# EAGLE board BulkBoard2 (EAGLE 9.0.0), part 1 of 2
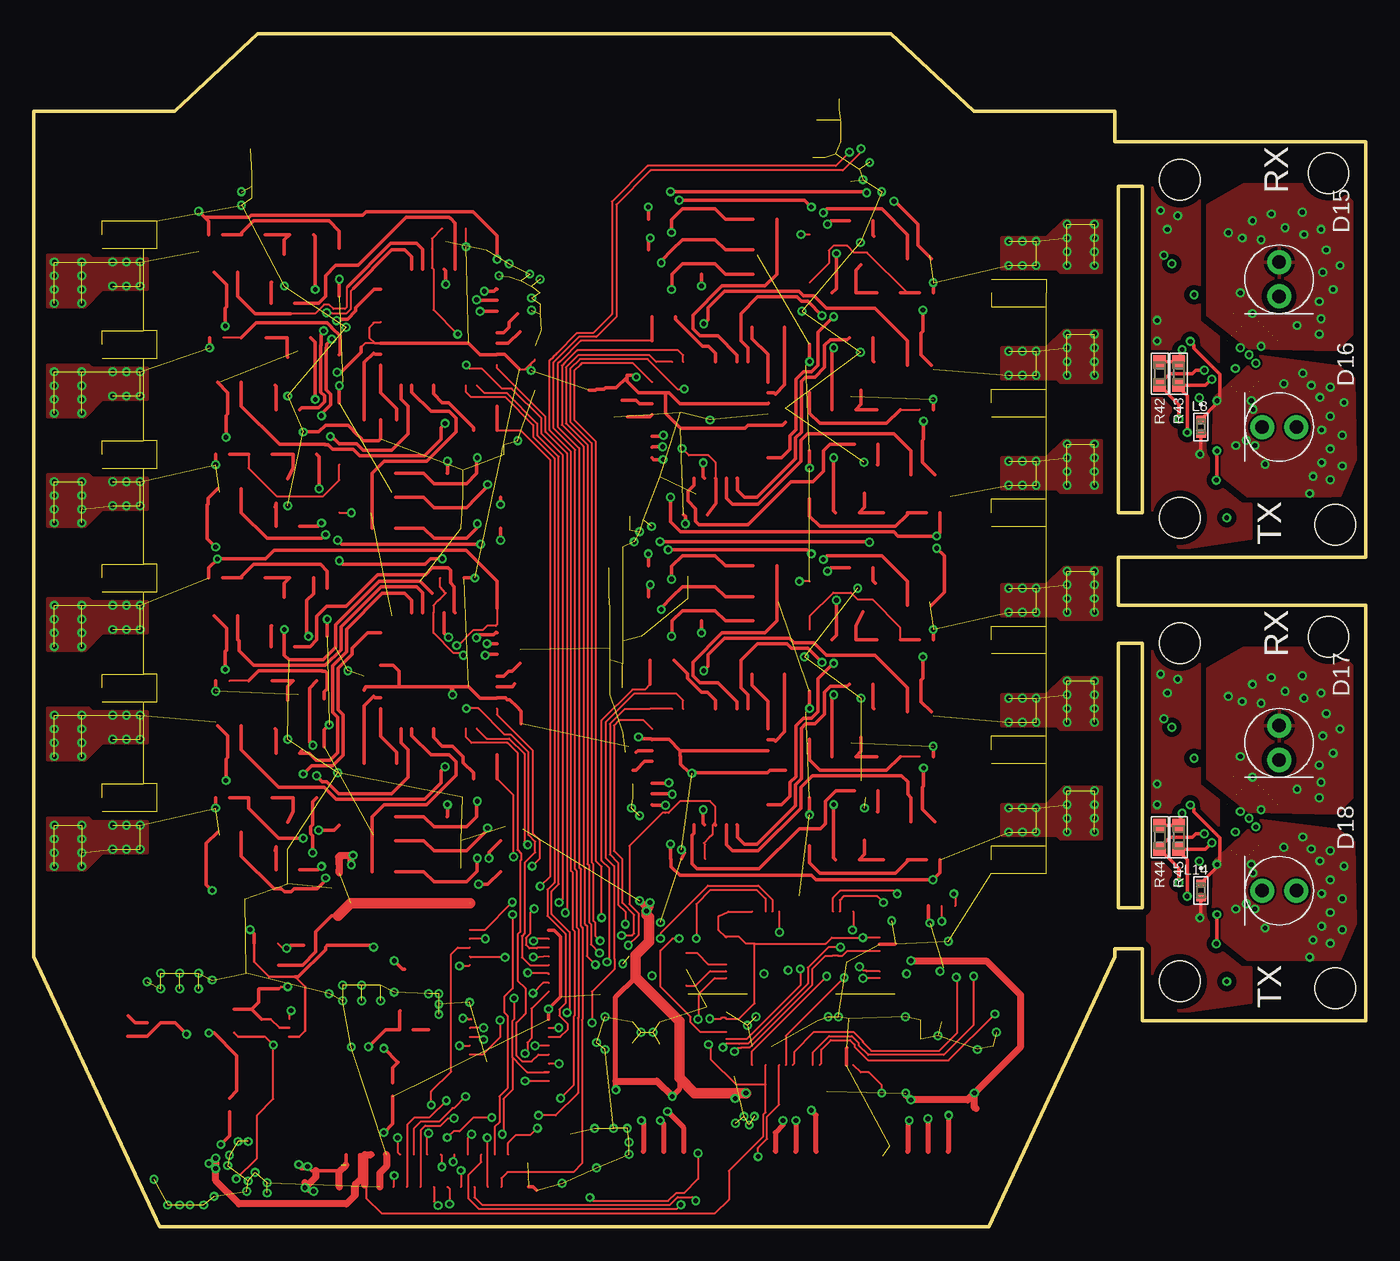
[diagram p0: board, top side]
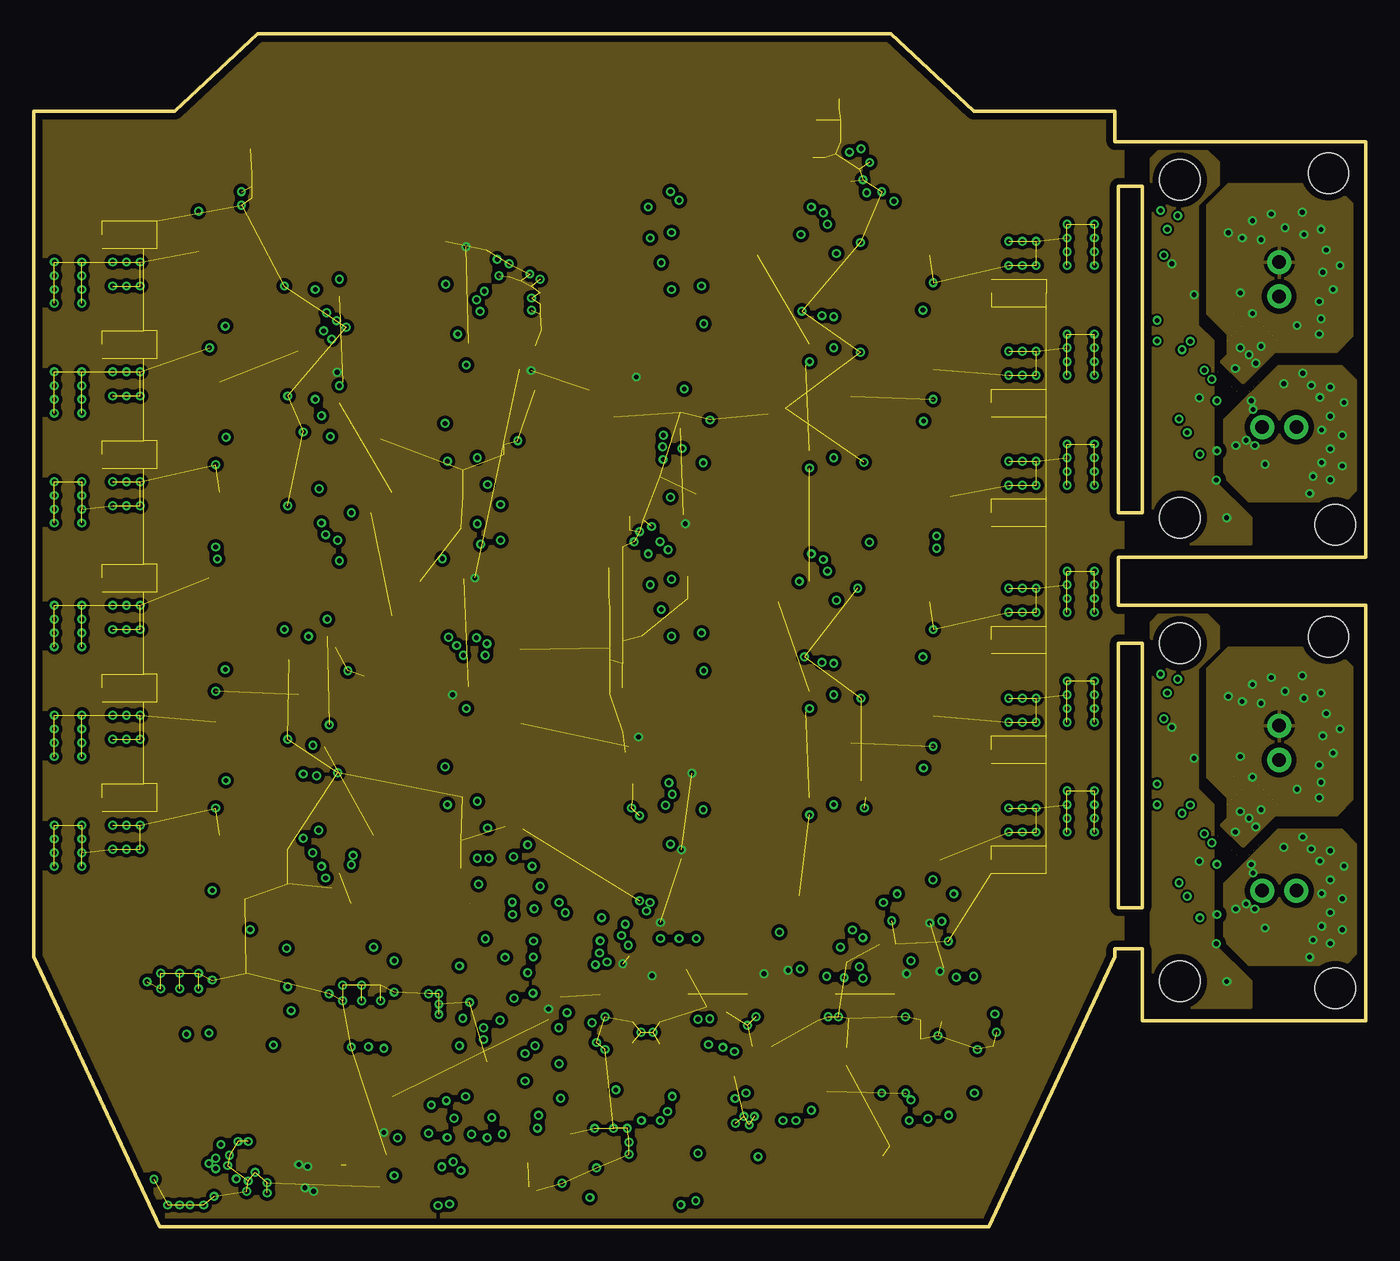
[diagram p1: board, inner layer Route2]
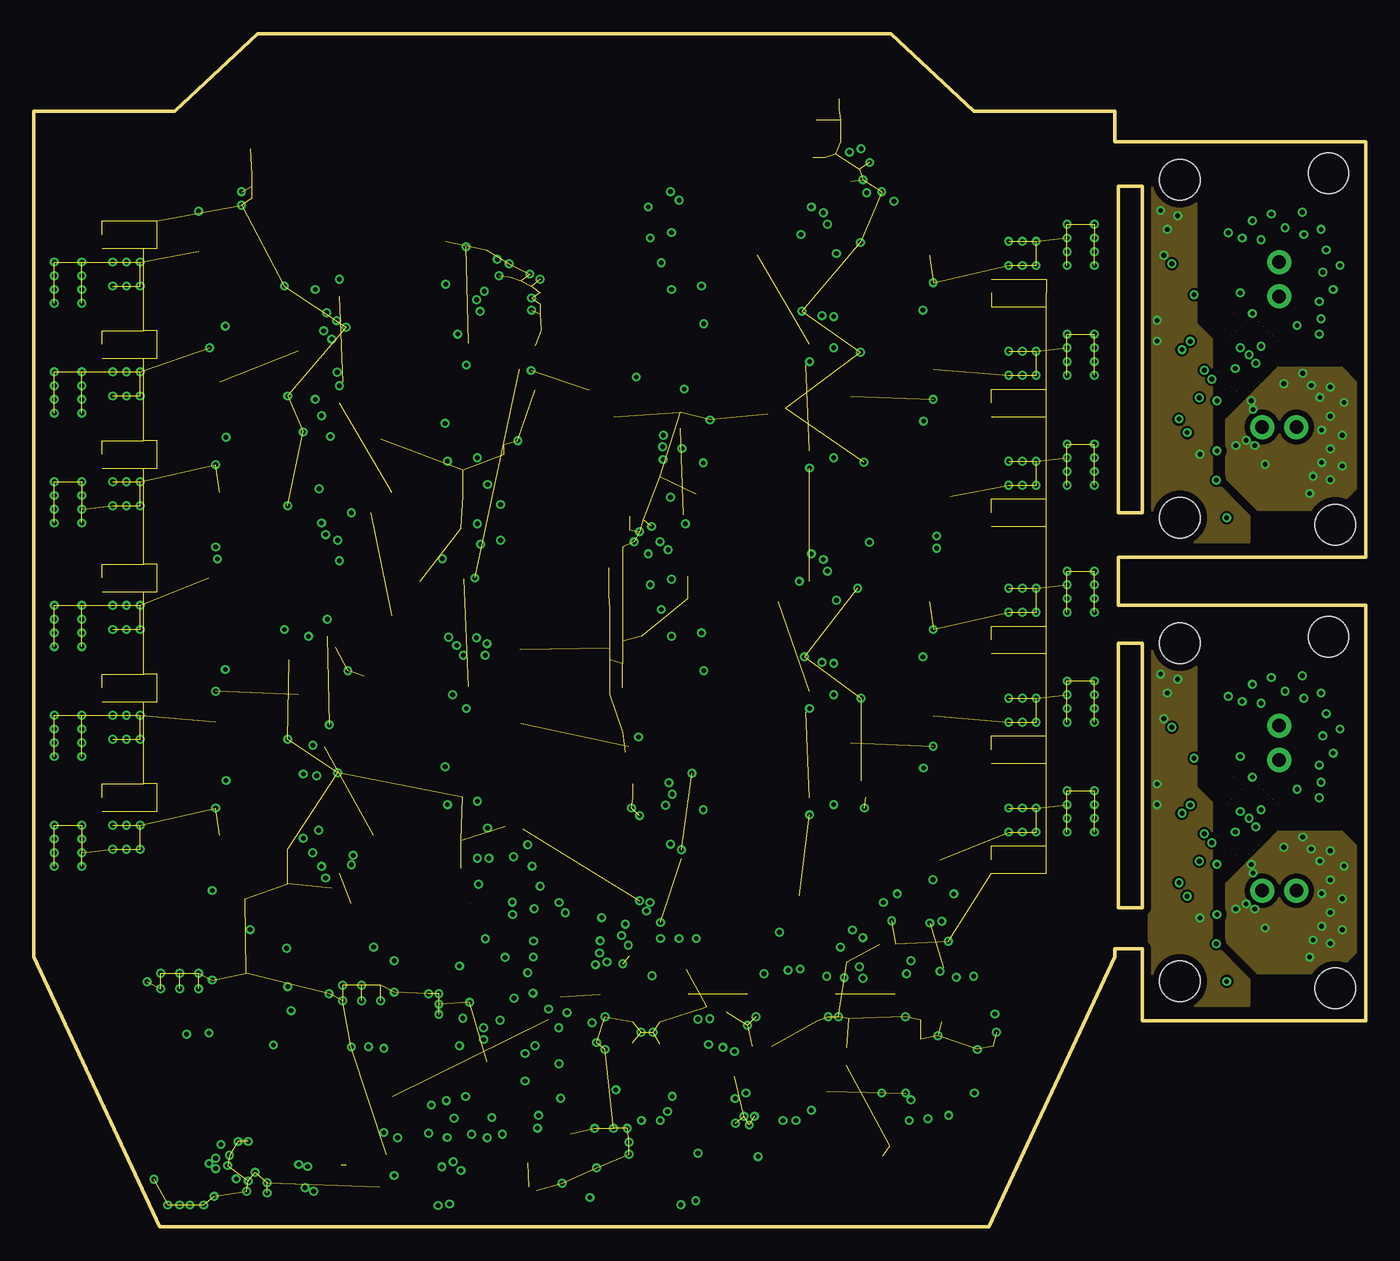
[diagram p2: board, inner layer Route15]
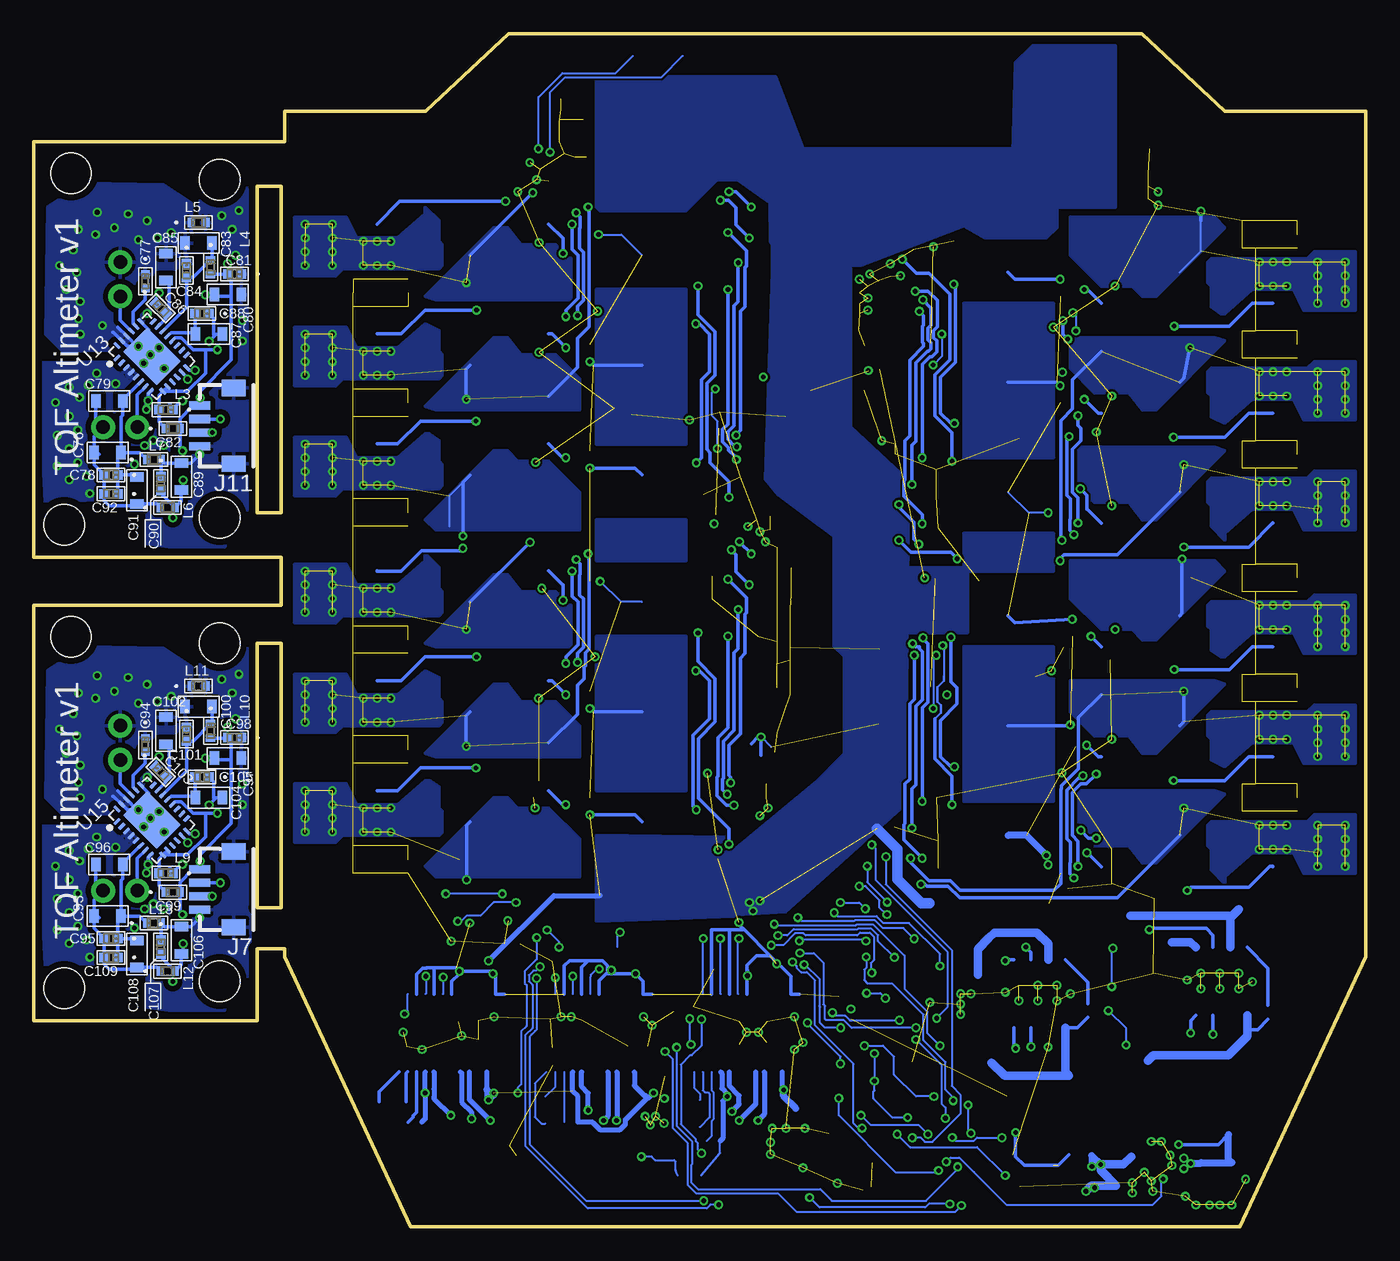
[diagram p3: board, bottom side, seen from below]

Size 98.55 x 88.25 mm. Coordinates in mm from the lower left corner, seen from the top.
Outline: 0,20 9.33,0 70.67,0 80,20 80,20.56 82.04,20.56 82.04,15.24 98.55,15.24 98.55,45.97 80.26,45.97 80.26,49.53 98.55,49.53 98.55,80.26 80,80.27 80,82.54 69.56,82.54 63.43,88.25 16.57,88.25 10.44,82.54 0,82.54 0,20
Outline: 80.26,43.18 82.04,43.18 82.04,23.62 80.26,23.62 80.26,43.18
Outline: 80.26,76.96 82.04,76.96 82.04,52.83 80.26,52.83 80.26,76.96
Copper layers (1*2*15*16): Top 0.035mm / dielectric 0.2mm / Route2 0.035mm / dielectric 1.2mm / Route15 0.035mm / dielectric 0.2mm / Bottom 0.035mm
Design rules "Elecrow_4-layer_PCB_eagle_rule": minimum track width 6mil, minimum drill 12mil, track to track 6mil, track to pad 6mil, pad to pad 6mil, via to via 8mil, smd to smd 0mil, copper to edge 20mil, drill to drill 10mil, minimum pad ring 6mil, minimum via ring 6mil, stop-mask expansion 0mil, vias tented up to drill 100mil, thermal gap 10mil
Holes 3 mm at 84.8,52.45 84.8,77.45 95.8,77.95 96.3,51.95 84.8,18.16 84.8,43.16 95.8,43.66 96.3,17.66

## Footprints (pad centres in the part's own frame; a part is rotated, then mirrored left to right if it is on the bottom)
0603_CAPACITOR = smd 0.701 x 1.001: 1 -1.001,0; 2 1.001,0
0402_CAPACITOR = smd 0.559 x 0.61: 1 -0.521,0; 2 0.521,0
0402-M = smd 0.711 x 0.711: 1 -0.508,0; 2 0.508,0
5MM_LED = drill 1 pad 1.778: A 1.27,0; C -1.27,0
JST_SH_4POS = smd 0.6 x 1.55: 1 -1.5,0; 2 -0.5,0; 3 0.5,0; 4 1.5,0 | smd 1.2 x 1.8: P$5 -2.8,2.525; P$6 2.8,2.525
IND_1005-M = smd 0.525 x 0.702: 1 -0.542,0; 2 0.542,0
RC0603N-M = smd 0.965 x 0.914: 1 -0.876,0; 2 0.876,0
28-VQFN = smd 0.6 x 0.24: 1 -1.9,1.75; 2 -1.9,1.25; 3 -1.9,0.75; 4 -1.9,0.25; 5 -1.9,-0.25; 6 -1.9,-0.75; 7 -1.9,-1.25; 8 -1.9,-1.75; 15 1.9,-1.75; 16 1.9,-1.25; 17 1.9,-0.75; 18 1.9,-0.25; 19 1.9,0.25; 20 1.9,0.75; 21 1.9,1.25; 22 1.9,1.75 | smd 0.24 x 0.6: 9 -1.25,-2.4; 10 -0.75,-2.4; 11 -0.25,-2.4; 12 0.25,-2.4; 13 0.75,-2.4; 14 1.25,-2.4; 23 1.25,2.4; 24 0.75,2.4; 25 0.25,2.4; 26 -0.25,2.4; 27 -0.75,2.4; 28 -1.25,2.4 | smd 2.55 x 3.55: 29 0,0

## Placement (x,y rotation side)
C76  1uF  [0603_CAPACITOR]  93.09,57.28 180 bottom
C77  6pF  [0402_CAPACITOR]  90.3,69.95 270 bottom
C78  0.1uF  [0402-M]  92.84,55.63 180 bottom
C79  1uF  [0603_CAPACITOR]  92.96,61.09 180 bottom
C80  1uF  [0603_CAPACITOR]  84.2,68.96 0 bottom
C81  0.1uF  [0402-M]  83.69,70.48 180 bottom
C82  0.1uF  [0402-M]  88.77,60.45 180 bottom
C83  1uF  [0603_CAPACITOR]  86.36,72.77 180 bottom
C84  0.1uF  [0402-M]  87.25,70.74 270 bottom
C85  1uF  [0603_CAPACITOR]  88.77,70.99 90 bottom
C86  0.1uF  [0402-M]  89.15,67.95 315 bottom
C87  1uF  [0603_CAPACITOR]  85.6,66.04 0 bottom
C88  0.1uF  [0402-M]  86.11,67.56 180 bottom
C89  1uF  [0603_CAPACITOR]  87.63,55.5 90 bottom
C90  0.1uF  [0402-M]  89.15,54.99 270 bottom
C91  1uF  [0603_CAPACITOR]  90.93,54.48 90 bottom
C92  0.1uF  [0402-M]  92.84,54.23 180 bottom
C93  1uF  [0603_CAPACITOR]  93.09,22.99 180 bottom
C94  6pF  [0402_CAPACITOR]  90.3,35.66 270 bottom
C95  0.1uF  [0402-M]  92.84,21.34 180 bottom
C96  1uF  [0603_CAPACITOR]  92.96,26.8 180 bottom
C97  1uF  [0603_CAPACITOR]  84.2,34.67 0 bottom
C98  0.1uF  [0402-M]  83.69,36.2 180 bottom
C99  0.1uF  [0402-M]  88.77,26.16 180 bottom
C100  1uF  [0603_CAPACITOR]  86.36,38.48 180 bottom
C101  0.1uF  [0402-M]  87.25,36.45 270 bottom
C102  1uF  [0603_CAPACITOR]  88.77,36.7 90 bottom
C103  0.1uF  [0402-M]  89.15,33.65 315 bottom
C104  1uF  [0603_CAPACITOR]  85.6,31.75 0 bottom
C105  0.1uF  [0402-M]  86.11,33.27 180 bottom
C106  1uF  [0603_CAPACITOR]  87.63,21.21 90 bottom
C107  0.1uF  [0402-M]  89.15,20.7 270 bottom
C108  1uF  [0603_CAPACITOR]  90.93,20.19 90 bottom
C109  0.1uF  [0402-M]  92.84,19.94 180 bottom
D15  SFH203FA  [5MM_LED]  92.15,70.1 90 top
D16  SFH4550  [5MM_LED]  92.16,59.16 0 top
D17  SFH203FA  [5MM_LED]  92.15,35.81 90 top
D18  SFH4550  [5MM_LED]  92.16,24.87 0 top
J7  [JST_SH_4POS]  86.29,24.97 270 bottom
J11  [JST_SH_4POS]  86.29,59.26 270 bottom
L3  MMZ1005S182ET000IND_1005-M  [IND_1005-M]  88.27,59.05 0 bottom
L4  MMZ1005S182ET000IND_1005-M  [IND_1005-M]  85.47,70.99 270 bottom
L5  MMZ1005S182ET000IND_1005-M  [IND_1005-M]  86.36,74.3 0 bottom
L6  MMZ1005S182ET000IND_1005-M  [IND_1005-M]  88.65,53.21 0 bottom
L7  MMZ1005S182ET000IND_1005-M  [IND_1005-M]  89.66,56.77 0 bottom
L8  MMZ1005S182ET000IND_1005-M  [IND_1005-M]  86.36,59.18 270 top
L9  MMZ1005S182ET000IND_1005-M  [IND_1005-M]  88.27,24.77 0 bottom
L10  MMZ1005S182ET000IND_1005-M  [IND_1005-M]  85.47,36.7 270 bottom
L11  MMZ1005S182ET000IND_1005-M  [IND_1005-M]  86.36,40 0 bottom
L12  MMZ1005S182ET000IND_1005-M  [IND_1005-M]  88.65,18.92 0 bottom
L13  MMZ1005S182ET000IND_1005-M  [IND_1005-M]  89.66,22.48 0 bottom
L14  MMZ1005S182ET000IND_1005-M  [IND_1005-M]  86.36,24.89 270 top
R42  1k  [RC0603N-M]  83.31,63.12 270 top
R43  1k  [RC0603N-M]  84.71,63.12 270 top
R44  1k  [RC0603N-M]  83.31,28.83 270 top
R45  1k  [RC0603N-M]  84.71,28.83 270 top
U13  OPT3101  [28-VQFN]  89.82,64.39 45 bottom
U15  OPT3101  [28-VQFN]  89.82,30.1 45 bottom

## Library data of the parts
C76 C77 C79 C80 C83 C85 C87 C89 C91 C93 C94 C96 C97 C100 C102 C104 C106 C108 D15-D18 J7 J11 U13 U15 = thanics_robotics
C78 C81 C82 C84 C86 C88 C90 C92 C95 C98 C99 C101 C103 C105 C107 C109 = 0.1uF-capacitor-0402; MANUFACTURER_PART_NUMBER: 0402ZD104KAT2A; VENDOR: AVX Corporation
L3-L14 = 1.8k-fb; MANUFACTURER_PART_NUMBER: MMZ1005S182ET000; VENDOR: TDK
R42-R45 = 1k-resistor; CASE: 0603 1608 metric; COMPOSITION: Thick Film; COPYRIGHT: Copyright C 2015 Accelerated Designs. All rights reserved; DATASHEET: httpwww.yageo.comdocumentsrecentPYuRC0603_51_RoHS_L_4.pdf; DESCRIPTION: RES 1.0K OHM 110W 5% 0603 SMD; DIGIKEYPARTNUMBER: 3111.0KGRTRND; HEIGHT: 0.022" 0.55mm; LEADSTYLE: Surface Mount SMD SMT; MANUFACTURER_PART_NUMBER: RC0603JR071KL; NEWARKPARTNUMBER: 14M7231; NUMBEROFTERMINATIONS: 2; PACKAGECASE: 0603 1608 Metric; PACKAGING: Tape &amp Reel TR; POWERWATTS: 0.1W 110W; QUANTITY_AVAILABLE: 0; RESISTANCEINOHMS: 1.00K; RESISTANCEOHMS: 1K; SIZEDIMENSION: 0.063" L x 0.031" W 1.60mm x 0.80mm; TEMPERATURECOEFFICIENT: 100ppm°C; TOLERANCE: 5%; VENDOR: Yageo; VOLTAGEWORKING: 50V

## Nets
+3V1: C80.1 C81.2 C89.1 C90.2 J11.1 L3.2 L4.2 L6.2
+3V2: C87.1 C88.2 U13.19
+3V4: C97.1 C98.2 C106.1 C107.2 J7.1 L9.2 L10.2 L12.2
+3V5: C104.1 C105.2 U15.19
AGND: C77.1 C83.2 C84.1 C85.2 C86.1 D15.A L5.1 U13.23 U13.26 U13.27 U13.29
AGND1: C94.1 C100.2 C101.1 C102.2 C103.1 D17.A L11.1 U15.23 U15.26 U15.27 U15.29
AVCC: C83.1 C84.2 L4.1 U13.20
AVCC1: C100.1 C101.2 L10.1 U15.20
GND1: C80.2 C81.1 C89.2 C90.1 J11.4 J11.P$5 J11.P$6 L5.2 L7.2 L8.2
GND2: C97.2 C98.1 C106.2 C107.1 J7.4 J7.P$5 J7.P$6 L11.2 L13.2 L14.2
GNDIO: C82.1 C87.2 C88.1 L8.1 U13.3 U13.4 U13.5 U13.8
GNDIO1: C99.1 C104.2 C105.1 L14.1 U15.3 U15.4 U15.5 U15.8
I2C_SCL: J11.3 R43.2 U13.13
I2C_SCL1: J7.3 R45.2 U15.13
I2C_SDA: J11.2 R42.2 U13.14
I2C_SDA1: J7.2 R44.2 U15.14
N$23: D16.C U13.7
N$26: C77.2 U13.24
N$27: D15.C U13.25
N$28: C85.1 C86.2 U13.21
N$29: D18.C U15.7
N$49: C94.2 U15.24
N$50: D17.C U15.25
N$51: C102.1 C103.2 U15.21
VCCIO: C82.2 L3.1 R42.1 R43.1 U13.9 U13.10 U13.18
VCCIO1: C99.2 L9.1 R44.1 R45.1 U15.9 U15.10 U15.18
VDDLED: C76.2 C78.2 C79.2 C91.1 C92.2 D16.A L6.1
VDDLED1: C93.2 C95.2 C96.2 C108.1 C109.2 D18.A L12.1
VSS: C76.1 C78.1 C79.1 C91.2 C92.1 L7.1 U13.6
VSS1: C93.1 C95.1 C96.1 C108.2 C109.1 L13.1 U15.6

## Tracks (layer width: path | path; a pad name or v marks a point on that pad's centre or on a via)
+3V1  (via drill 0.35)
  Top 0.254: v87.55,57.4 87.55,55.29 v87.5,55.24
  Bottom 0.254: 83.95,68.83 83.95,64.14 86.29,61.79 J11.1 86.35,60.7 86.82,60.7 87.72,59.8 L3.2 87.72,57.58 v87.55,57.4 | C90.2 89.15,54.26 L6.2 87.63,53.69 C89.1 87.5,54.62 v87.5,55.24 | C80.1 85.07,68.83 83.95,68.83 | 83.95,68.83 83.95,70.23 C81.2 84.23,70.45 L4.2
  other vias: 86.23,61.34 84.2,71.25 85.85,68.96 88.27,52.45
  pour Route2: 90.04,50.55 83.57,50.55 82.68,51.43 82.68,78.99 83.44,79.76 86.61,79.76 87.63,78.74 87.63,77.09 86.11,75.56 86.11,66.68 87.25,65.53 87.25,55.24 90.04,52.45
+3V2  (1 unrouted)
  Bottom 0.254: U13.19 88.4,66.16 86.72,66.16 C87.1 86.61,66.06 C88.2
+3V3  (via drill 0.35)
  Top 0.152: 51.22,21.4 51.17,21.45 | 51.17,21.45 50.67,21.95 50.67,22.99 51.4,23.33 53.15,23.33 | 51.17,21.45 51.18,21.46 52.2,21.46 52.71,20.96 53.34,20.96 | 24.61,2.97 24.61,2.13 25.72,1.02 50.42,1.02 51.44,2.03 51.44,4.16 53.96,6.68 53.96,8.29 54.15,8.48 54.15,10.54 | 54.15,10.54 54.15,11.98 | 60.65,11.98 61.19,11.43 61.79,11.43 62.74,10.48 v62.74,9.91 | v50.01,15.4 50.84,15.4 50.93,15.49 51.13,15.49 51.22,15.4 52.2,15.4 53.34,16.55 53.34,20.96 | 53.34,20.96 58.61,20.96 59.05,21.4 v61.34,21.4 62.57,21.4 | 54.15,10.54 51.94,10.54 50.1,12.38 50.1,13.31 v49.92,13.49
  Top 0.254: 24.11,3.47 23.8,3.17 23.61,2.97 23.61,2.3 23.67,2.23 23.14,1.7 | 24.11,3.47 24.11,5.36 24.49,5.36 | 24.11,3.47 24.46,3.12 24.61,2.97 | 25.11,5.36 24.94,5.36 | 14.48,8.52 14.48,6.73 v13.84,6.1
  Top 0.508: 24.49,3.85 24.49,5.36 24.94,5.36 | 24.49,3.85 23.8,3.17 23.8,2.37 23.14,1.7 15.19,1.7 13.46,3.43 v13.46,4.32 v13.46,5.08 13.08,4.7 v12.95,4.7 | 24.49,3.85 24.49,3.15 24.46,3.12
  Bottom 0.152: v61.34,21.4 61.34,19.79 62.22,18.91 62.22,18.04 62.1,17.92 62.1,14.86 62.48,14.48 62.48,10.54 62.74,10.29 v62.74,9.91 | v49.92,13.49 50.01,13.58 v50.01,15.4
  Bottom 0.254: v13.84,6.1 10.92,6.1 10.16,6.85
  Bottom 0.508: v12.95,4.7 12.25,4.7 12.19,4.76 9.91,4.76 10.16,5.01 10.16,6.85
+3V4  (via drill 0.35)
  Top 0.254: v87.55,23.11 87.55,21 v87.5,20.96
  Bottom 0.254: 83.95,34.54 83.95,29.85 86.29,27.5 J7.1 86.35,26.41 86.82,26.41 87.72,25.51 L9.2 87.72,23.29 v87.55,23.11 | C107.2 89.15,19.97 L12.2 87.63,19.4 C106.1 87.5,20.34 v87.5,20.96 | C97.1 85.07,34.54 83.95,34.54 | 83.95,34.54 83.95,35.94 C98.2 84.23,36.16 L10.2
  other vias: 86.23,27.05 84.2,36.96 85.85,34.67 88.27,18.16
  pour Route2: 90.04,16.26 83.57,16.26 82.68,17.14 82.68,44.7 83.44,45.47 86.61,45.47 87.63,44.45 87.63,42.8 86.11,41.27 86.11,32.38 87.25,31.24 87.25,20.96 90.04,18.16
+3V5  (1 unrouted)
  Bottom 0.254: U15.19 88.4,31.87 86.72,31.87 C104.1 86.61,31.77 C105.2
+5V  (via drill 0.35)  (15 unrouted)
  Top 0.152: v30.99,39.37 30.86,39.5 30.86,39.95 | 25.68,66.95 25.63,66.9 25.15,66.9 25.15,66.85 24.82,66.52 24.82,65.77 25.24,65.35 25.68,65.35 24.5,65.35 24.23,65.08 | 31.83,47.93 31.83,48.01 | 35.94,63.44 36.36,63.44 36.8,63.88 | v36.8,63.35 36.8,63.88 | 36.8,63.88 37.08,64.16 | v31.98,72.49 31.98,73.86 | 48.51,33.58 v48.69,33.55
  Top 0.254: 27.03,39.95 25.68,39.95 24.56,39.95 24.43,39.7 | 27.03,39.95 30.86,39.95 30.99,39.95 | 30.99,39.95 32.19,39.95 33.02,39.12 34.23,39.12 34.27,39.15 34.89,39.15 35.03,39.01 35.22,39.01 35.75,38.48 36.07,38.16 36.07,37.24 | 25.68,65.35 32.19,65.35 33.02,64.52 34.23,64.52 34.27,64.55 34.83,64.55 35.94,63.44 | 43.88,62.86 43.88,62.55 44.74,61.69 45.75,61.69 45.78,61.72 46.74,61.72 | 43.88,62.86 43.88,62.99 44.45,62.99 v44.58,62.86 | 46.74,61.72 46.99,61.72 47.82,60.89 54.33,60.89 54.35,60.91 | 54.33,35.24 47.82,35.24 | 47.82,35.24 46.99,36.07 45.78,36.07 45.75,36.04 45.65,36.13 44.96,36.13 44.85,36.24 v44.75,36.24 | 43.88,62.86 43.09,62.08 42.29,62.08 42.19,61.98 41.66,61.98 41.55,61.87 41.1,61.87 | 22.71,4.17 20.88,4.17 20.57,4.17 v20.27,4.47 | 22.71,4.17 22.86,4.17 23.11,4.41 23.11,4.57 23.11,5.36 | 22.71,4.17 22.61,4.06 22.61,2.97 | 38.1,15.36 v38.1,16.13 38.99,17.02 38.99,21.46 38.49,21.96 38.1,21.96 | 66.19,23.75 66.19,22.58 v66.29,22.48 | 47.93,27.23 48.13,27.69 v47.91,27.91 | 25.68,41.55 26.57,41.55 27.03,41.1 27.03,39.95 | 48.08,52.68 48.21,52.55 v48.21,52.02 | 55.63,59.54 55.38,59.29 54.33,59.29 54.32,59.28 52.83,59.28 52.63,59.08 47.85,59.08 46.74,60.2 46.74,61.72 | 55.63,33.78 54.48,33.78 54.33,33.64 54.27,33.58 48.51,33.58 47.85,34.24 47.85,34.82 47.82,34.85 47.82,35.24 | 24.23,65.08 24.23,64.71 22.74,63.22 v22.45,63.22 | v32.64,48.01 31.83,48.01 | v30.99,39.37 30.99,39.95 | v20.7,2.64 20.32,2.64 v20.07,2.9 | 26.54,9.66 26.54,7.62 v25.91,6.99
  Top 0.508: 19.6,4.61 v19.61,4.62 19.76,4.47 v20.27,4.47 | 20.07,3.29 v20.07,2.9 20.88,3.71 20.88,4.17 | 22.61,2.97 22.61,4.07 23.11,4.57
  Bottom 0.152: 43.99,35.51 44.73,36.24 v44.75,36.24
  Bottom 0.254: 41.89,17.22 42.54,17.22 42.54,18.54 44.07,20.07 | 67.63,17.22 67.63,18.16 67.09,18.71 67.09,18.89 v67.06,18.92 | 68.94,17.22 68.94,19.18 | 44.07,20.07 45.09,20.07 45.79,19.36 45.79,19.05 | 45.79,19.05 45.79,17.22 | 52.81,17.22 53.46,17.22 53.46,18.16 v54.04,18.73 55.88,18.73 | 57.53,19.69 56.46,19.69 56.1,19.33 56.1,18.96 55.88,18.73 | 58.01,17.22 58.01,19.2 57.53,19.69 | 57.53,19.69 58.93,19.69 59.31,19.3 59.31,17.23 59.31,17.22 | 45.97,21.97 44.07,20.07 | 47.12,21.97 48.39,21.97 48.39,17.22 | 47.12,21.97 47.09,21.95 47.09,17.22 | 56.71,17.22 56.71,18.22 56.2,18.73 56.07,18.73 | 55.88,18.73 56.07,18.73 | 63.73,17.22 64.39,17.22 64.39,18.54 v64.58,18.73 64.77,18.92 v67.06,18.92 | v67.06,18.92 67.31,19.18 68.94,19.18 | 68.94,19.18 69.47,19.18 69.5,19.15 69.79,19.15 70.23,18.71 70.23,17.22 | 45.47,35.75 44.97,36.24 v44.75,36.24 44.75,34.89 44.73,34.88 | 47.12,21.97 45.97,21.97 | 45.97,21.97 46.38,22.37 v46.38,22.52 | 45.79,19.05 45.74,19 v45.74,18.59 | v55.81,18.99 56.07,18.73 | v25.91,6.99 25.91,5.21 25.27,4.57 22.73,4.57 21.97,5.33
  Bottom 0.508: 20.27,5.28 v19.61,4.62 | 20.29,5.3 20.27,5.28 | 20.27,5.28 v20.27,4.47
  Bottom 0.635: 17.33,5.21 17.92,4.62 v19.61,4.62 19.61,4.18 18.48,3.05 20.29,3.05 v20.7,2.64
  other vias: 43.58,19.48
  pour Route2 (isolate 0.254): -0.25,89.15 80.42,89.15 80.42,0 -0.25,0
A0  (via drill 0.35)
  Top 0.152: 58.15,11.98 58.28,12.11 58.28,13.12 58.98,13.82 60.4,13.82 60.73,13.49 60.73,13.31 61.72,12.32 67.69,12.32 v71.12,15.75
  Bottom 0.152: v71.12,15.75 70.88,15.98 70.88,17.22
A1  (via drill 0.35)
  Top 0.152: v59.96,18.44 55.65,14.13 55.65,11.98
  Bottom 0.152: 59.96,17.22 v59.96,18.44
A2  (via drill 0.35)
  Top 0.152: v49.02,21.34 49.02,23.88 50.09,24.94 53.49,24.94 54.15,24.28 54.15,23.33
  Bottom 0.152: 49.04,17.22 49.04,21.32 v49.02,21.34
A_SENSE  (via drill 0.35)
  Top 0.254: 26.78,30.35 28.84,30.35 29.6,29.59 32.02,29.59 32.78,30.35 32.78,31.46 v32.82,31.5 | 34.27,43.95 34.22,43.99 34.01,43.79 32.95,43.79 v32.75,43.59
  Bottom 0.254: v32.82,31.5 32.82,38.4 32.39,38.83 32.39,43.12 32.75,43.49 v32.75,43.59
A_SENSE2  (via drill 0.35)
  Top 0.254: 26.78,55.75 28.84,55.75 29.6,54.99 32.02,54.99 32.78,55.75 32.78,56.86 v32.82,56.9 | 34.27,69.35 34.22,69.39 34.05,69.22 v33.34,69.22
  Bottom 0.254: v32.82,56.9 32.82,63.8 32.26,64.36 32.11,64.36 31.72,64.75 31.72,65.54 31.98,65.79 31.98,66.29 31.7,66.57 31.7,68.53 32.39,69.22 v33.34,69.22
A_SENSE3  (via drill 0.35)
  Top 0.254: 53.23,70.48 51.17,70.48 50.41,71.25 47.99,71.25 47.23,70.48 47.23,69.38 v47.19,69.34 | v46.57,56.77 45.87,56.77 45.75,56.89
  Bottom 0.254: v46.57,56.77 46.65,56.94 46.65,56.97 47.14,57.46 47.14,57.62 47.6,58.08 47.6,58.99 47.19,59.39 v47.19,69.34
A_SENSE4  (via drill 0.35)
  Top 0.254: 53.23,44.83 51.17,44.83 50.41,45.59 47.99,45.59 47.23,44.83 47.23,43.73 v47.19,43.69 | v46.74,31.19 45.79,31.19 45.75,31.24
  Bottom 0.254: v47.19,43.69 47.19,36.93 47.93,36.2 47.93,33.35 48,33.28 48,31.9 47.3,31.19 v46.74,31.19
AGND  (via drill 0.35)  (3 unrouted)
  Bottom 0.254: 90.93,65.15 U13.26 92.33,66.54 92.33,66.55 | 90.93,65.15 90.17,64.39 89.92,64.39 | 89.92,64.39 U13.29 | U13.23 90.04,66.38 90.04,64.52 89.92,64.39 | 92.71,66.17 92.66,66.17 U13.27 91.64,65.15 90.93,65.15
  other vias: 93.47,66.68 95.12,66.04 95.25,67.18 95.12,68.45 96.14,69.34 95.38,70.61 95.63,72.26 95.25,73.79 93.98,73.41 93.85,75.06 92.58,73.91 91.57,74.93 90.8,73.03 90.17,74.42 89.41,73.15 88.39,73.53 90.17,67.56 89.28,69.09 96.65,71.12 89.28,65.02 90.42,63.88 89.92,64.52 88.9,63.5 90.8,65.15
  pour Bottom (isolate 0.381): 86.87,67.44 86.87,75.69 89.03,77.09 94.74,77.22 97.54,75.44 97.66,66.04 96.39,64.77 91.06,64.9
  pour Top (isolate 0.381): 89.92,65.02 96.39,64.9 97.54,66.04 97.54,75.82 96.27,77.09 89.53,77.09 86.87,75.56 86.87,67.44
  pour Route2 (isolate 0.381): 86.87,75.56 86.87,67.56 88.39,66.04 88.39,64.52 87.88,64.01 89.41,62.48 89.53,62.48 91.82,64.77 96.39,64.77 97.54,65.91 97.54,75.69 96.14,77.09 89.03,77.09 88.39,77.09
AGND1  (via drill 0.35)  (3 unrouted)
  Bottom 0.254: 90.93,30.86 U15.26 92.33,32.25 92.33,32.26 | 90.93,30.86 90.17,30.1 89.92,30.1 | 89.92,30.1 U15.29 | U15.23 90.04,32.09 90.04,30.23 89.92,30.1 | 92.71,31.88 92.66,31.88 U15.27 91.64,30.86 90.93,30.86
  other vias: 93.47,32.38 95.12,31.75 95.25,32.89 95.12,34.16 96.14,35.05 95.38,36.32 95.63,37.97 95.25,39.5 93.98,39.12 93.85,40.77 92.58,39.62 91.57,40.64 90.8,38.73 90.17,40.13 89.41,38.86 88.39,39.24 90.17,33.27 89.28,34.8 96.65,36.83 89.28,30.73 90.42,29.59 89.92,30.23 88.9,29.21 90.8,30.86
  pour Bottom (isolate 0.381): 86.87,33.15 86.87,41.4 89.03,42.8 94.74,42.93 97.54,41.15 97.66,31.75 96.39,30.48 91.06,30.61
  pour Top (isolate 0.381): 89.92,30.73 96.39,30.61 97.54,31.75 97.54,41.53 96.27,42.8 89.53,42.8 86.87,41.27 86.87,33.15
  pour Route2 (isolate 0.381): 86.87,41.27 86.87,33.27 88.39,31.75 88.39,30.23 87.88,29.72 89.41,28.19 89.53,28.19 91.82,30.48 96.39,30.48 97.54,31.62 97.54,41.4 96.14,42.8 89.03,42.8 88.39,42.8
AHIN
  Top 0.152: 29.06,48.26 28.99,48.26
  Top 0.254: 31.17,45.44 31.11,45.5 31.11,47.36 30.84,47.64 30.84,48.58 30.67,48.74 29.47,48.74 28.99,48.26 25.45,48.26 23.11,45.92 21.67,45.92 20.93,45.19 20.93,43.43 20.43,42.93 19.3,42.93
AHIN2
  Top 0.254: 19.3,68.33 21.08,68.33 21.59,68.83 21.59,70.36 22.35,71.12 24,71.12 27.56,74.68 30.73,74.68 30.81,74.6 30.82,74.6 31.17,74.25 31.17,70.84
AHIN3
  Top 0.254: 60.71,57.91 58.93,57.91 58.42,57.4 58.42,55.88 57.66,55.12 56.01,55.12 52.95,52.06 52.86,51.97 52.83,51.94 49.24,51.94 48.97,52.21 48.97,53.13 48.39,53.71 48.39,54.43 48.84,54.88 48.84,55.4
AHIN4
  Top 0.254: 48.84,29.74 48.84,29.12 48.69,28.97 48.69,26.88 49.08,26.49 53.67,26.49 56.64,29.46 58.22,29.46 58.58,29.82 58.58,31.49 59.34,32.26 60.71,32.26
ALIN
  Top 0.254: 28.77,45.44 28.77,46.92 28.32,47.37 25.71,47.37 22.73,44.39 22.73,42.7 21.57,41.54 16.27,41.54 15.19,42.62 15.19,43.34 15.1,43.43 15.1,45.21
ALIN2
  Top 0.152: 23.24,69.6 23.16,69.52 23.16,68.03 23.03,67.9 22.17,67.9 21.84,68.22 21.48,68.22 20.82,67.56 19,67.56
  Top 0.254: 28.77,70.84 28.77,72.32 28.32,72.77 26.42,72.77 23.24,69.6 | 19,67.56 16.37,67.56 15.1,68.83 15.1,70.61
ALIN3
  Top 0.254: 51.24,55.4 51.24,53.92 51.69,53.47 53.59,53.47 56.77,56.64 56.77,58.2 57.25,58.67 63.64,58.67 64.91,57.4 64.91,55.63
ALIN4
  Top 0.254: 51.24,29.74 51.24,28.26 51.69,27.81 53.59,27.81 56.77,30.99 56.77,32.54 57.6,33.38 64.21,33.38 64.67,32.92 64.67,31.99 64.91,31.75 64.91,29.97
AOUT  (via drill 0.35)  (14 unrouted)
  Top 0.152: 34.29,45.77 34.29,44.58 34.17,44.46 33.54,44.46 33.22,44.14 32.51,44.14 31.38,43.01 v31.29,43.01
  Top 0.254: 12.95,48.01 12.95,48.77 v13.59,49.4 13.61,49.43 17.17,49.43 17.78,50.04 32,50.04 34.29,47.75 34.29,45.77 | 30.59,30.35 30.61,30.37 v30.61,31.24
  Bottom 0.152: v31.29,43.01 31.2,42.91 31.2,40.74
  Bottom 0.203: 31.2,40.74 31.2,40.4 31.67,39.92 31.67,38.85 31.42,38.59 31.42,38.05 31.88,37.59
  Bottom 0.254: v30.61,31.24 30.61,33.35 31.88,34.62 31.88,37.59 | v13.59,49.4 13.59,45.38 13.76,45.21
  other vias: 7.87,44.2 6.86,44.2 5.84,44.2 1.52,45.97 1.52,44.96 1.52,43.94 1.52,42.93 3.56,42.93 3.56,43.94 3.56,44.96 3.56,45.97 5.84,45.97 6.86,45.97 7.87,45.97
  pour Bottom (no thermals): 16.51,43.43 17.27,44.2 19.56,44.2 21.84,46.48 21.84,49.28 11.18,49.28 10.41,48.51 15.49,43.43
  pour Bottom (no thermals): 11.43,46.23 4.32,46.23 3.81,46.74 0.76,46.74 0.76,42.42 4.57,42.42 5.33,43.94 8.38,43.94 10.41,42.16 10.72,42.16 11.43,42.67 11.43,44.2 11.68,44.45 11.68,45.97
  pour Top (no thermals): 1.02,46.48 4.06,46.48 4.32,46.23 8.38,46.23 8.38,43.94 5.08,43.94 3.81,42.67 1.02,42.67
AOUT2  (via drill 0.35)  (14 unrouted)
  Top 0.254: 12.95,73.41 12.95,74.37 v12.19,75.13 12.65,74.68 15.93,74.68 16.09,74.83 24.33,74.83 24.59,75.08 32.51,75.08 34.29,73.3 v34.29,71.58 | 30.59,55.75 30.61,55.77 v30.61,56.64
  Bottom 0.152: 13.76,70.61 12.19,72.18 12.19,74.42
  Bottom 0.254: 12.19,74.42 v12.19,75.13 | v30.61,56.64 30.61,58.75 31.88,60.02 31.88,63.02 30.76,64.14 30.76,68.99 32.32,70.55 33.26,70.55 v34.29,71.58
  other vias: 7.87,69.6 6.86,69.6 5.84,69.6 1.52,71.37 1.52,70.36 1.52,69.34 1.52,68.33 3.56,68.33 3.56,69.34 3.56,70.36 3.56,71.37 5.84,71.37 6.86,71.37 7.87,71.37
  pour Bottom (no thermals): 16.51,68.83 17.27,69.6 19.56,69.6 21.84,71.88 21.84,74.68 11.18,74.68 10.41,73.91 15.49,68.83
  pour Bottom (no thermals): 11.43,71.63 4.32,71.63 3.81,72.14 0.76,72.14 0.76,67.82 4.57,67.82 5.33,69.34 8.38,69.34 10.41,67.56 10.72,67.56 11.43,68.07 11.43,69.6 11.68,69.85 11.68,71.37
  pour Top (no thermals): 1.02,71.88 4.06,71.88 4.32,71.63 8.38,71.63 8.38,69.34 5.08,69.34 3.81,68.07 1.02,68.07
AOUT3  (via drill 0.35)  (14 unrouted)
  Top 0.254: 49.42,70.48 49.4,70.47 v49.4,69.6 | 67.06,52.83 67.06,51.36 v66.8,51.1 63.96,51.1 63.65,51.41 47.85,51.41 47.12,52.15 v47.12,53.97
  Bottom 0.152: 66.25,55.63 66.27,55.6 67.82,54.06 67.82,51.82
  Bottom 0.254: v49.4,69.6 49.4,67.49 48.13,66.22 48.13,63.01 48.52,62.62 48.74,62.4 48.74,61.59 48.74,57.51 48.51,57.28 48.51,56.52 47.12,55.12 v47.12,53.97 | v66.8,51.1 66.8,55.08 66.27,55.6
  other vias: 72.14,56.64 73.15,56.64 74.17,56.64 78.49,54.86 78.49,55.88 78.49,56.9 78.49,57.91 76.45,57.91 76.45,56.9 76.45,55.88 76.45,54.86 74.17,54.86 73.15,54.86 72.14,54.86
  pour Bottom (no thermals): 63.5,57.4 62.74,56.64 60.45,56.64 58.17,54.36 58.17,51.56 68.83,51.56 69.6,52.32 64.52,57.4
  pour Bottom (no thermals): 68.58,54.61 75.69,54.61 76.2,54.1 79.25,54.1 79.25,58.42 75.44,58.42 74.68,56.9 71.63,56.9 69.6,58.67 69.29,58.67 68.58,58.17 68.58,56.64 68.33,56.39 68.33,54.86
  pour Top (no thermals): 78.99,54.36 75.95,54.36 75.69,54.61 71.63,54.61 71.63,56.9 74.93,56.9 76.2,58.17 78.99,58.17
AOUT4  (via drill 0.35)  (14 unrouted)
  Top 0.254: 67.06,27.18 67.06,26.21 v66.52,25.68 57.88,25.68 57.55,26.01 47.81,26.01 47.17,26.66 47.17,27.19 47.12,27.25 v47.12,28.32 | 49.42,44.83 49.4,44.82 v49.4,43.94
  Bottom 0.254: v49.4,43.94 49.4,41.84 48.13,40.57 48.13,37.35 49.37,36.12 49.37,31.71 47.12,29.46 v47.12,28.32 | v66.52,25.68 66.52,29.7 66.25,29.97
  other vias: 72.14,30.99 73.15,30.99 74.17,30.99 78.49,29.21 78.49,30.23 78.49,31.24 78.49,32.26 76.45,32.26 76.45,31.24 76.45,30.23 76.45,29.21 74.17,29.21 73.15,29.21 72.14,29.21
  pour Bottom (no thermals): 63.5,31.75 62.74,30.99 60.45,30.99 58.17,28.7 58.17,25.91 68.83,25.91 69.6,26.67 64.52,31.75
  pour Bottom (no thermals): 68.58,28.96 75.69,28.96 76.2,28.45 79.25,28.45 79.25,32.77 75.44,32.77 74.68,31.24 71.63,31.24 69.6,33.02 69.29,33.02 68.58,32.51 68.58,30.99 68.33,30.73 68.33,29.21
  pour Top (no thermals): 78.99,28.7 75.95,28.7 75.69,28.96 71.63,28.96 71.63,31.24 74.93,31.24 76.2,32.51 78.99,32.51
AVCC  (1 unrouted)
  Bottom 0.254: C83.1 85.36,71.65 L4.1 86.77,70.23 C84.2 87.25,68.02 U13.20
AVCC1  (1 unrouted)
  Bottom 0.254: C100.1 85.36,37.36 L10.1 86.77,35.94 C101.2 87.25,33.73 U15.20
B0  (via drill 0.35)
  Top 0.152: 57.65,11.98 57.65,12.91 58.85,14.12 60.53,14.12 61.03,13.61 61.03,13.44 61.75,12.73 67.33,12.73 69.54,14.93 v69.54,18.54
  Bottom 0.152: v69.54,18.54 69.54,17.26 69.58,17.22
B1  (via drill 0.35)
  Top 0.152: 53.15,11.98 53.15,13.01 v58.67,18.54
  Bottom 0.152: 58.66,17.22 58.66,18.53 v58.67,18.54
B2  (via drill 0.35)
  Top 0.152: v47.75,21.34 47.24,21.34 46.36,20.45 46.36,17.78 48.6,15.54 48.6,15.14 49.33,14.4 51.22,14.4
  Bottom 0.152: 47.74,17.22 v47.74,21.32 v47.75,21.34
B_SENSE  (via drill 0.35)
  Top 0.254: 26.78,28.57 28.84,28.57 29.6,27.81 32.02,27.81 32.78,28.57 33.58,29.38 v33.58,29.52 | 34.27,43.15 v33.53,43.15
  Bottom 0.254: v33.58,29.52 33.58,32.41 33.27,32.71 33.27,38.52 32.79,39 32.79,42.54 33.02,42.77 33.02,42.93 33.31,42.93 v33.53,43.15
B_SENSE2  (via drill 0.35)
  Top 0.254: 26.78,53.97 28.84,53.97 29.6,53.21 32.02,53.21 32.78,53.97 33.58,54.77 v33.58,54.91 | v32.77,68.58 32.8,68.55 34.27,68.55
  Bottom 0.254: v33.58,54.91 33.58,57.81 33.27,58.11 33.27,63.92 32.42,64.77 32.36,64.77 32.16,64.97 32.16,65.4 32.38,65.62 32.38,66.46 32.16,66.69 32.16,67.97 v32.77,68.58
B_SENSE3  (via drill 0.35)
  Top 0.254: 53.23,72.26 51.17,72.26 50.41,73.03 47.99,73.03 47.23,72.26 46.43,71.46 v46.43,71.32 | v46.53,57.71 45.76,57.71 45.75,57.69
  Bottom 0.254: v46.43,71.32 46.43,68.43 46.74,68.12 46.74,59.27 47.19,58.82 47.19,58.25 46.73,57.79 v46.53,57.71
B_SENSE4  (via drill 0.35)
  Top 0.254: 53.23,46.61 51.17,46.61 50.41,47.37 47.99,47.37 47.23,46.61 46.43,45.81 v46.43,45.67 | v47.24,32 47.21,32.04 45.75,32.04
  Bottom 0.254: v46.43,45.67 46.43,42.77 46.74,42.47 46.74,36.73 47.52,35.94 47.52,33.19 47.6,33.11 47.6,32.36 v47.24,32
BATT_SCL  (via drill 0.35)
  Top 0.152: v37.34,8.25 38.61,8.25 40.25,9.9 40.25,15.44 40.31,15.5 40.31,22.02 40.19,22.14 40.19,26.32 40.06,26.46 40.06,57.48 38.47,59.07 38.47,63.97 38.51,64.01 | v32.38,6.86 32.11,6.58 32.11,5.36 | v61.21,79.76 61.21,79.5 59.87,78.16 45.64,78.16 43.1,75.62 43.1,67.31 41.63,65.84 40.34,65.84 38.51,64.01 | 38.51,64.01
  Bottom 0.152: v32.38,6.86 33.07,7.54 36.63,7.54 v37.34,8.25 | v61.21,79.76 61.21,83.57 59.44,85.34 55.5,85.34 54.23,86.61
BATT_SDA  (via drill 0.35)
  Top 0.152: v38.99,9.52 39.95,10.48 39.95,15.57 40.01,15.63 40.01,21.89 39.89,22 39.89,26.2 39.75,26.34 39.75,57.35 38.16,58.94 38.16,64.09 38.44,64.38 | 31.61,2.97 31.62,2.98 31.62,4.17 v31.61,4.18 | v60.36,79.5 59.34,78.49 45.41,78.49 42.77,75.84 42.77,67.51 41.4,66.14 40.21,66.14 38.67,64.6 38.5,64.43 | 38.44,64.38 38.5,64.43 | 38.5,64.43 38.44,64.38 | 38.44,64.38
  Bottom 0.152: v38.99,9.52 38.99,8.25 34.8,4.06 31.62,4.06 31.61,4.08 v31.61,4.18 | v60.36,79.5 60.36,83.92 59.23,85.04 52.12,85.04 50.55,86.61
BHIN
  Top 0.254: 19.83,35.21 19.67,35.05 20.38,35.05 20.9,34.52 21.93,34.52 22.47,35.06 22.47,37.72 22.11,38.08 22.11,41.5 23.13,42.53 23.13,44.22 25.78,46.86 27.43,46.86 27.94,46.35 27.94,45.47 27.97,45.44
BHIN2  (via drill 0.35)
  Top 0.152: 23.65,69.43 23.46,69.25 23.46,67.91 23.15,67.59 22.04,67.59 22.02,67.62 v21.66,67.62
  Top 0.254: 19.67,60.45 19.83,60.61 21.08,60.61 21.51,61.04 21.51,61.47 21.23,61.74 21.23,65.2 21.25,65.21 21.25,66.08 v21.45,66.28 | 27.97,70.84 27.94,70.87 27.94,71.76 27.43,72.26 26.48,72.26 23.65,69.43
  Bottom 0.152: v21.66,67.62 21.45,67.4 v21.45,66.28
BHIN3
  Top 0.254: 60.34,65.79 60.18,65.63 58.93,65.63 58.5,65.2 58.5,63.58 57.79,62.86 57.12,62.86 56.8,62.55 56.8,58.8 56.36,58.36 56.36,56.81 53.53,53.97 52.58,53.97 52.07,54.48 52.07,55.36 52.04,55.4
BHIN4
  Top 0.254: 60.34,40.13 60.18,39.98 58.93,39.98 58.5,39.54 58.5,37.92 57.79,37.21 57.12,37.21 56.8,36.89 56.8,33.15 56.36,32.71 56.36,31.16 53.53,28.32 52.58,28.32 52.07,28.83 52.07,29.71 52.04,29.74
BLIN  (via drill 0.35)
  Top 0.254: 15.35,37.08 15.35,35.31 18.12,32.54 21.49,32.54 22.38,31.64 28.91,31.64 30.13,32.86 30.13,33.73 v30.44,34.04 | 30.37,44.47 30.37,45.44 30.37,43.93 v30.69,43.61
  Bottom 0.254: v30.44,34.04 30.71,34.04 31.47,34.8 31.47,37.45 30.24,38.69 30.24,39.88 30.69,40.33 30.69,42.76 | v30.69,43.61 30.69,43.26 | 30.69,43.26 | 30.69,43.26 30.69,42.76 | 30.69,42.76
BLIN2  (via drill 0.35)
  Top 0.254: 15.35,62.48 15.35,60.71 18.17,57.89 21.54,57.89 21.57,57.86 21.79,57.86 22.12,57.53 23.62,57.53 24.11,57.04 28.91,57.04 30.13,58.26 30.13,59.13 v30.44,59.44 | v30.48,69.72 30.48,70.73 30.37,70.84
  Bottom 0.254: v30.44,59.44 30.71,59.44 31.47,60.2 31.47,62.85 30.36,63.97 30.36,69.6 v30.48,69.72
BLIN3  (via drill 0.35)
  Top 0.254: 64.66,63.75 64.66,65.53 62.24,67.95 58.65,67.95 57.73,68.87 56.96,68.87 56.63,69.2 51.1,69.2 49.88,67.98 49.88,67.11 v49.57,66.8 | v49.53,56.52 49.53,55.5 49.64,55.4
  Bottom 0.254: v49.57,66.8 49.3,66.8 48.54,66.04 48.54,63.26 49.15,62.66 49.15,56.9 v49.53,56.52
BLIN4  (via drill 0.35)
  Top 0.254: 64.66,38.1 64.66,39.88 62.24,42.29 58.65,42.29 57.73,43.21 56.23,43.21 55.9,43.54 51.1,43.54 49.88,42.32 49.88,41.46 v49.57,41.15 | v49.53,30.86 49.53,29.85 49.64,29.74
  Bottom 0.254: v49.57,41.15 49.3,41.15 48.54,40.39 48.54,37.61 49.77,36.38 49.77,31.1 v49.53,30.86
BOOT0  (via drill 0.35)
  Top 0.152: 55.15,23.33 55.15,21.82 v55.17,21.79
  Bottom 0.152: v55.17,21.79 55.39,21.58 55.39,20.7
BOUT  (via drill 0.35)  (15 unrouted)
  Top 0.254: 13.46,40.39 v13.46,39.62 | 34.53,28.57 33.68,27.72 v33.68,27.28
  Bottom 0.254: v13.46,39.62 13.46,37.38 13.76,37.08 | v33.68,27.28 33.68,26.97 32.31,25.6 30.73,25.6 30.02,24.89 23.06,24.89 22.55,25.4 22.55,32.38 22.53,32.41 22.53,32.62 21.26,33.9 21.26,37.68 19.56,39.38
  other vias: 7.87,36.07 6.86,36.07 5.84,36.07 1.52,37.85 1.52,36.83 1.52,35.81 1.52,34.8 3.56,34.8 3.56,35.81 3.56,36.83 3.56,37.85 5.84,37.85 6.86,37.85 7.87,37.85
  pour Bottom (no thermals): 16.51,35.05 17.53,36.32 20.07,36.32 21.84,38.1 21.84,40.39 11.18,40.39 10.41,40.13 15.49,35.05
  pour Bottom (no thermals): 11.43,38.1 4.32,38.1 3.81,38.61 0.76,38.61 0.76,34.29 4.57,34.29 5.33,35.81 8.38,35.81 10.41,34.04 11.43,34.54 11.43,36.07 11.68,36.32 11.68,37.85
  pour Top (no thermals): 1.02,38.35 4.06,38.35 4.32,38.1 8.38,38.1 8.38,35.81 5.08,35.81 3.81,34.54 1.02,34.54
BOUT2  (via drill 0.35)  (15 unrouted)
  Top 0.254: 13,65.79 v13,65.02 | v22.48,50.8 22.78,50.49 v33.07,50.49 | 34.53,53.97 v34.53,53.44
  Bottom 0.254: v13,65.02 13.46,62.78 13.76,62.48 | 19.56,64.78 21.69,62.65 21.69,60.5 22.55,59.64 22.55,51.05 22.48,50.98 v22.48,50.8 | v33.07,50.49 33.43,50.85 33.43,52.12 34.53,53.23 v34.53,53.44
  other vias: 7.87,61.47 6.86,61.47 5.84,61.47 1.52,63.25 1.52,62.23 1.52,61.21 1.52,60.2 3.56,60.2 3.56,61.21 3.56,62.23 3.56,63.25 5.84,63.25 6.86,63.25 7.87,63.25
  pour Bottom (no thermals): 16.51,60.45 17.53,61.72 20.07,61.72 21.84,63.5 21.84,65.79 11.18,65.79 10.41,65.53 15.49,60.45
  pour Bottom (no thermals): 11.43,63.5 4.32,63.5 3.81,64.01 0.76,64.01 0.76,59.69 4.57,59.69 5.33,61.21 8.38,61.21 10.41,59.44 11.43,59.94 11.43,61.47 11.68,61.72 11.68,63.25
  pour Top (no thermals): 1.02,63.75 4.06,63.75 4.32,63.5 8.38,63.5 8.38,61.21 5.08,61.21 3.81,59.94 1.02,59.94
BOUT3  (via drill 0.35)  (15 unrouted)
  Top 0.254: 66.55,60.45 v66.55,61.21 | v45.62,73.15 45.48,73.01 45.48,72.26 | v47.75,75.95 57.02,75.95 v57.53,75.44
  Bottom 0.254: v66.55,61.21 66.55,63.46 66.25,63.75 | 60.45,61.45 58.32,63.59 58.32,65.73 57.46,66.6 57.46,75.44 v57.53,75.44 | v45.62,73.15 46.58,74.12 46.58,75.39 47.14,75.95 v47.75,75.95
  other vias: 72.14,64.77 73.15,64.77 74.17,64.77 78.49,62.99 78.49,64.01 78.49,65.02 78.49,66.04 76.45,66.04 76.45,65.02 76.45,64.01 76.45,62.99 74.17,62.99 73.15,62.99 72.14,62.99
  pour Bottom (no thermals): 63.5,65.79 62.48,64.52 59.94,64.52 58.17,62.74 58.17,60.45 68.83,60.45 69.6,60.71 64.52,65.79
  pour Bottom (no thermals): 68.58,62.74 75.69,62.74 76.2,62.23 79.25,62.23 79.25,66.55 75.44,66.55 74.68,65.02 71.63,65.02 69.6,66.8 68.58,66.29 68.58,64.77 68.33,64.52 68.33,62.99
  pour Top (no thermals): 78.99,62.48 75.95,62.48 75.69,62.74 71.63,62.74 71.63,65.02 74.93,65.02 76.2,66.29 78.99,66.29
BOUT4  (via drill 0.35)  (15 unrouted)
  Top 0.254: 66.55,34.8 v66.55,35.56 | v45.62,47.5 45.48,47.36 45.48,46.61 | v46.94,50.09 57.23,50.09 v57.53,49.78
  Bottom 0.254: v66.55,35.56 66.55,37.8 66.25,38.1 | 60.45,35.8 58.32,37.93 58.32,40.08 57.84,40.56 57.84,41.39 57.72,41.51 57.72,42.48 57.46,42.74 57.46,49.71 v57.53,49.78 | v46.94,50.09 46.58,49.73 46.58,48.46 v45.62,47.5
  other vias: 72.14,39.12 73.15,39.12 74.17,39.12 78.49,37.34 78.49,38.35 78.49,39.37 78.49,40.39 76.45,40.39 76.45,39.37 76.45,38.35 76.45,37.34 74.17,37.34 73.15,37.34 72.14,37.34
  pour Bottom (no thermals): 63.5,40.13 62.48,38.86 59.94,38.86 58.17,37.08 58.17,34.8 68.83,34.8 69.6,35.05 64.52,40.13
  pour Bottom (no thermals): 68.58,37.08 75.69,37.08 76.2,36.58 79.25,36.58 79.25,40.89 75.44,40.89 74.68,39.37 71.63,39.37 69.6,41.15 68.58,40.64 68.58,39.12 68.33,38.86 68.33,37.34
  pour Top (no thermals): 78.99,36.83 75.95,36.83 75.69,37.08 71.63,37.08 71.63,39.37 74.93,39.37 76.2,40.64 78.99,40.64
C0  (via drill 0.35)
  Top 0.152: 56.15,11.98 56.28,12.11 56.28,12.96 57.74,14.42 60.66,14.42 61.34,13.74 61.34,13.67 61.98,13.03 67,13.03 68.33,14.35 68.33,18.4 v68.26,18.47
  Bottom 0.152: v68.26,18.47 68.26,17.25 68.28,17.22
C1  (via drill 0.35)
  Top 0.152: v56.71,19.08 56.71,17.87 52.74,13.9 51.22,13.9
  Bottom 0.152: 57.36,17.22 57.36,18.5 57.32,18.54 57.32,18.67 56.91,19.08 v56.71,19.08
C2  (via drill 0.35)
  Top 0.152: v46.38,21.34 46.38,21.74 49.89,25.25 53.61,25.25 54.65,24.21 54.65,23.33
  Bottom 0.152: 46.44,17.22 46.44,21.27 v46.38,21.34
C_SENSE  (via drill 0.35)
  Top 0.254: 26.78,26.29 28.84,26.29 29.6,25.53 32.02,25.53 32.78,26.29 32.82,26.33 v32.82,27.28 | 34.27,42.35 33.46,42.35 v33.4,42.29
  Bottom 0.254: v32.82,27.28 34.19,28.65 34.19,29.77 34.09,29.87 34.09,32.77 33.73,33.12 33.73,38.71 33.4,39.04 v33.4,42.29
C_SENSE2  (via drill 0.35)
  Top 0.254: 26.78,51.69 28.84,51.69 29.6,50.93 32.02,50.93 32.78,51.69 32.78,51.98 v32.82,52.02 | v33.02,67.72 33.05,67.75 34.27,67.75
  Bottom 0.254: v33.02,67.72 32.72,67.42 32.72,66.7 32.79,66.63 32.79,65.45 32.72,65.38 32.72,65.13 33.73,64.11 33.73,58.52 34.09,58.17 34.09,55.27 34.19,55.17 34.19,54.05 32.82,52.68 v32.82,52.02
C_SENSE3  (via drill 0.35)
  Top 0.254: 53.23,74.55 51.17,74.55 50.41,75.31 47.99,75.31 47.23,74.55 47.19,74.51 v47.19,73.56 | v46.58,58.57 46.51,58.49 45.75,58.49
  Bottom 0.254: v47.19,73.56 45.82,72.19 45.82,71.07 45.92,70.97 45.92,68.07 46.28,67.72 46.28,58.94 46.64,58.59 v46.58,58.57
C_SENSE4  (via drill 0.35)
  Top 0.254: 53.23,48.89 51.17,48.89 50.41,49.66 47.99,49.66 47.23,48.89 47.19,48.86 v47.19,47.9 | v46.99,32.86 46.96,32.84 45.75,32.84
  Bottom 0.254: v47.19,47.9 45.82,46.54 45.82,45.42 45.92,45.32 45.92,42.42 46.28,42.06 46.28,36.47 47.11,35.64 47.11,33.4 46.99,33.28 v46.99,32.86
CHIN  (via drill 0.35)
  Top 0.254: 19.67,26.42 21.03,26.42 v21.29,26.67 | 25.68,43.95 24.7,43.95 23.54,42.79 23.54,42.36 22.52,41.34 22.52,38.25 22.88,37.89 22.88,34.9 22.1,34.12 20.56,34.12 v19.94,33.5
  Bottom 0.254: v21.29,26.67 21.29,28.53 21.72,28.96 21.72,32.13 21.53,32.32 21.08,32.77 20.67,32.77 v19.94,33.5
CHIN2  (via drill 0.35)
  Top 0.254: 19.67,51.82 21.03,51.82 v21.29,52.07 | v21.29,60 21.29,60.15 21.97,60.83 21.97,61.59 21.64,61.92 21.64,65.03 21.65,65.05 21.65,65.27 v22.05,65.67 | v22.41,67.04 22.52,67.16 23.22,67.16 23.82,67.76 23.82,68 25.17,69.35 25.68,69.35
  Bottom 0.254: v21.29,52.07 21.29,53.93 21.72,54.36 21.72,57.53 21.08,58.17 21.08,59.08 21.29,59.29 v21.29,60 | v22.41,67.04 22.41,66.03 v22.05,65.67
CHIN3  (via drill 0.35)
  Top 0.254: 60.34,74.42 58.98,74.42 v58.72,74.17 | 54.33,56.89 55.32,56.89 55.96,57.53 55.96,58.53 56.39,58.97 56.39,62.72 56.95,63.27 57.56,63.27 58.04,63.75 58.04,66.2 v59.18,67.34
  Bottom 0.254: v58.72,74.17 58.72,72.31 58.29,71.88 58.29,68.71 59.18,67.82 v59.18,67.34
CHIN4  (via drill 0.35)
  Top 0.254: 60.34,48.77 58.98,48.77 v58.72,48.51 | 54.33,31.24 55.32,31.24 55.96,31.88 55.96,32.88 56.39,33.31 56.39,37.06 56.95,37.62 57.56,37.62 58.04,38.1 58.04,40.54 v59.18,41.68
  Bottom 0.254: v58.72,48.51 58.72,46.66 58.29,46.23 58.29,43.05 59.18,42.16 v59.18,41.68
CLIN  (via drill 0.35)
  Top 0.254: 15.35,29.21 15.35,27.43 17.77,25.02 18.32,25.02 18.54,24.79 19.05,24.79 19.27,25.02 20.95,25.02 21.59,25.65 v21.59,25.81 | 27.17,36.85 27.17,35.82 27.69,35.31 27.69,33.27 26.46,32.05 22.55,32.05 21.66,32.95 21.35,32.95 v20.92,33.38
  Bottom 0.254: v21.59,25.81 21.89,26.12 21.89,26.92 21.84,26.97 21.84,28.45 22.12,28.73 22.12,32.3 21.25,33.17 21.12,33.17 v20.92,33.38
CLIN2  (via drill 0.35)
  Top 0.254: 15.35,54.61 15.35,52.83 17.26,50.93 21.3,50.93 v21.59,51.21 | 27.17,62.25 27.17,61.22 27.69,60.71 27.69,58.67 26.46,57.45 24.36,57.45 23.88,57.94 22.57,57.94 22.22,58.29 22.12,58.29 v21.94,58.47
  Bottom 0.254: v21.59,51.21 21.89,51.52 21.89,52.32 21.84,52.37 21.84,53.85 22.12,54.13 22.12,58.04 22.12,58.28 v21.94,58.47
CLIN3  (via drill 0.35)
  Top 0.254: 64.66,71.63 64.66,73.41 62.75,75.31 58.71,75.31 v58.42,75.03 | 52.84,63.98 52.84,65.02 52.32,65.53 52.32,67.56 53.55,68.79 56.46,68.79 56.79,68.46 57.28,68.46 v58.32,67.41
  Bottom 0.254: v58.42,75.03 58.12,74.72 58.12,73.92 58.17,73.87 58.17,72.39 57.89,72.11 57.89,68.54 58.32,68.1 v58.32,67.41
CLIN4  (via drill 0.35)
  Top 0.254: 64.66,45.97 64.66,47.75 62.75,49.66 58.71,49.66 v58.42,49.37 | 52.84,38.33 52.84,39.36 52.32,39.88 52.32,41.91 53.55,43.14 55.73,43.14 56.06,42.8 57.28,42.8 v58.32,41.76
  Bottom 0.254: v58.42,49.37 58.12,49.07 58.12,48.26 58.17,48.21 58.17,46.74 57.89,46.46 57.89,42.88 58.32,42.45 v58.32,41.76
COUT  (via drill 0.35)  (15 unrouted)
  Top 0.254: 13.46,31.75 v13.46,30.99 | 34.53,26.29 33.59,25.35 v32.92,25.35
  Bottom 0.254: v32.92,25.35 32.63,25.35 32.48,25.2 30.9,25.2 30.04,24.33 18.38,24.33 13.76,28.96
  other vias: 7.87,27.94 6.86,27.94 5.84,27.94 1.52,29.72 1.52,28.7 1.52,27.69 1.52,26.67 3.56,26.67 3.56,27.69 3.56,28.7 3.56,29.72 5.84,29.72 6.86,29.72 7.87,29.72
  pour Bottom (no thermals): 16.51,26.92 17.53,28.19 20.07,28.19 21.21,29.21 21.21,32.26 11.18,32.26 10.41,32 15.49,26.92
  pour Bottom (no thermals): 11.43,29.97 4.32,29.97 3.81,30.48 0.76,30.48 0.76,26.16 4.57,26.16 5.33,27.69 8.38,27.69 10.41,25.91 10.41,25.4 11.43,26.42 11.43,27.94 11.68,28.19 11.68,29.72
  pour Top (no thermals): 1.02,30.23 4.06,30.23 4.32,29.97 8.38,29.97 8.38,27.69 5.08,27.69 3.81,26.42 1.02,26.42
COUT2  (via drill 0.35)  (15 unrouted)
  Top 0.254: 13.46,57.15 v13.46,56.39 | v34.54,50.8 34.53,50.81 34.53,51.69 | v22.61,49.28 22.86,49.02 28.96,49.02 29.36,49.43 v30.23,49.43
  Bottom 0.254: 13.76,54.36 18.38,49.73 22.35,49.73 22.61,49.48 v22.61,49.28 | v30.23,49.43 30.71,49.91 32.8,49.91 32.82,49.89 33.63,49.89 v34.54,50.8
  other vias: 7.87,53.34 6.86,53.34 5.84,53.34 1.52,55.12 1.52,54.1 1.52,53.09 1.52,52.07 3.56,52.07 3.56,53.09 3.56,54.1 3.56,55.12 5.84,55.12 6.86,55.12 7.87,55.12
  pour Bottom (no thermals): 16.51,52.32 17.53,53.59 20.07,53.59 21.21,54.61 21.21,57.66 11.18,57.66 10.41,57.4 15.49,52.32
  pour Bottom (no thermals): 11.43,55.37 4.32,55.37 3.81,55.88 0.76,55.88 0.76,51.56 4.57,51.56 5.33,53.09 8.38,53.09 10.41,51.31 10.41,50.8 11.43,51.82 11.43,53.34 11.68,53.59 11.68,55.12
  pour Top (no thermals): 1.02,55.63 4.06,55.63 4.32,55.37 8.38,55.37 8.38,53.09 5.08,53.09 3.81,51.82 1.02,51.82
COUT3  (via drill 0.35)  (15 unrouted)
  Top 0.254: 66.55,69.09 v66.55,69.85 | v45.47,75.44 45.48,75.43 45.48,74.55 | v47.12,76.58 61.55,76.58 v61.63,76.51
  Bottom 0.254: 66.25,71.88 v61.63,76.51 | v47.12,76.58 46.61,76.58 v45.47,75.44
  other vias: 72.14,72.9 73.15,72.9 74.17,72.9 78.49,71.12 78.49,72.14 78.49,73.15 78.49,74.17 76.45,74.17 76.45,73.15 76.45,72.14 76.45,71.12 74.17,71.12 73.15,71.12 72.14,71.12
  pour Bottom (no thermals): 63.5,73.91 62.48,72.64 59.94,72.64 58.8,71.63 58.8,68.58 68.83,68.58 69.6,68.83 64.52,73.91
  pour Bottom (no thermals): 68.58,70.87 75.69,70.87 76.2,70.36 79.25,70.36 79.25,74.68 75.44,74.68 74.68,73.15 71.63,73.15 69.6,74.93 69.6,75.44 68.58,74.42 68.58,72.9 68.33,72.64 68.33,71.12
  pour Top (no thermals): 78.99,70.61 75.95,70.61 75.69,70.87 71.63,70.87 71.63,73.15 74.93,73.15 76.2,74.42 78.99,74.42
COUT4  (via drill 0.35)  (15 unrouted)
  Top 0.254: 66.55,43.43 v66.55,44.2 | v45.47,49.78 v45.48,49.77 45.48,48.89 | v46.33,50.7 46.69,50.7 61.78,50.7 v61.83,50.65
  Bottom 0.254: 66.25,46.23 v61.83,50.65 | v46.33,50.7 46.33,50.65 v45.47,49.78
  other vias: 72.14,47.24 73.15,47.24 74.17,47.24 78.49,45.47 78.49,46.48 78.49,47.5 78.49,48.51 76.45,48.51 76.45,47.5 76.45,46.48 76.45,45.47 74.17,45.47 73.15,45.47 72.14,45.47
  pour Bottom (no thermals): 63.5,48.26 62.48,46.99 59.94,46.99 58.8,45.97 58.8,42.93 68.83,42.93 69.6,43.18 64.52,48.26
  pour Bottom (no thermals): 68.58,45.21 75.69,45.21 76.2,44.7 79.25,44.7 79.25,49.02 75.44,49.02 74.68,47.5 71.63,47.5 69.6,49.28 69.6,49.78 68.58,48.77 68.58,47.24 68.33,46.99 68.33,45.47
  pour Top (no thermals): 78.99,44.96 75.95,44.96 75.69,45.21 71.63,45.21 71.63,47.5 74.93,47.5 76.2,48.77 78.99,48.77
EN  (via drill 0.35)
  Top 0.203: 16.29,20.98 16.29,19.62 17.42,18.49 19.36,18.49 20.07,17.78 20.07,14.53 19.62,14.08 18.91,14.08
  Top 0.254: v16,22 16.29,21.7 16.29,20.98 | v25.15,20.7 25.02,20.83 21.7,20.83 21.58,20.71 21.58,20.5 19.57,18.49 19.36,18.49
  Bottom 0.254: 15.98,22.02 v16,22 15.9,22.1 11.81,22.1 11.3,21.59 11.3,20.68 | v25.15,20.7 24.77,20.32 24.77,19.76
GND  (via drill 0.35)  (342 unrouted)
  Top 0.254: 25.65,59.69 25.65,58.29 25.53,58.17 24.38,58.17 24.14,58.41 23.97,58.57 23.24,59.31 21.59,59.31 21.08,58.8 v19.94,58.8 | v18.54,44.2 18.54,42.29 18.88,41.95 21.4,41.95 22.32,42.87 22.32,44.56 25.54,47.78 28.57,47.78 29.46,46.89 | 62.57,20.9 63.7,20.9 63.75,20.96 | 60.15,11.98 60.15,13.23 60.17,13.26 | 37.19,2.72 36.93,2.97 36.61,2.97
  Top 0.508: 26.11,5.36 26.11,4.49 25.61,3.99 25.61,2.97
  other vias: 18.8,61.47 18.8,53.34 18.54,69.6 23.11,66.55 50.04,59.69 56.85,67.74 35.81,58.17 44.83,51.43 45.72,51.82 23.24,41.15 18.8,36.07 22.48,33.6 63.47,22.66 67.67,21.13 57.02,42.16 61.21,39.12 60.96,47.24 61.47,30.99 61.16,64.69 61.16,72.82 61.42,56.57 61.34,77.47 61.85,78.74 62.74,76.58 15.37,75.56 15.37,76.58 24.26,17.88 22.86,17.88 22.86,16.74 24.26,16.74 25.65,16.74 26.67,17.37 21.84,17.25 32.26,16.61 29.97,15.72 29.97,16.48 29.97,17.25 29.21,17.25 45.82,14.4 44.93,14.4 41.63,13.64 42.27,15.54 42.27,13.13 53.31,8.18 52.55,8.18 51.92,7.67 52.93,7.54 58.78,15.54 59.54,15.54 53.44,15.54 52.81,14.91 64.49,15.54 66.9,14.15 69.82,13.13 71.22,14.4 41.63,4.37 44.04,5.38 44.04,6.27 43.92,7.29 42.9,7.29 41.5,7.29 39.09,3.23 12.19,18.77 10.8,18.77 9.4,18.77 9.4,17.63 10.8,17.63 12.19,17.63 13.21,18.26 8.38,18.14 12.57,1.63 11.56,1.63 10.8,1.63 9.91,1.63 8.89,3.53 13.34,2.26 15.75,2.64 15.88,3.4 16.38,4.04 17.27,3.28 17.27,2.51 15.88,6.32 15.11,6.32 14.48,5.31 14.35,4.55 36.7,70.48 34.42,70.36 35.18,71.25 37.47,70.1 36.83,68.71 36.83,67.82 23.49,13.31 44.42,50.67 44.22,30.99 44.83,30.43
GND1  (via drill 0.35)
  Top 0.254: L8.2 86.36,57.22 v86.29,57.15
  Bottom 0.254: 86.29,56.84 v86.29,57.15 | v86.29,57.15 J11.4 | C90.1 89.12,55.53 L7.2 88.85,56.5 C89.2 86.94,56.5 v86.29,57.15
  other vias: 83.37,75.18 83.62,71.88 83.88,73.79 84.64,74.8 83.11,67.06 83.11,65.53
  pour Top (isolate 0.381, rank 2): 86.49,80.26 87.63,79.12 87.63,64.14 87.12,56.01 90.04,53.47 90.04,50.93 84.84,50.16 82.42,52.58 82.42,80.14
  pour Bottom (isolate 0.381, rank 2): 86.61,79.88 87.76,78.74 87.76,63.75 87.25,55.63 90.17,53.09 90.17,50.55 84.96,49.78 82.55,52.2 82.55,79.76
  pour Route15: 89.92,50.67 83.44,50.67 82.55,51.56 82.55,79.12 83.31,79.88 86.49,79.88 87.5,78.87 87.5,77.22 85.98,75.69 85.98,66.8 87.12,65.66 87.12,55.37 89.92,52.58
GND2  (via drill 0.35)
  Top 0.254: L14.2 86.36,22.93 v86.29,22.86
  Bottom 0.254: 86.29,22.55 v86.29,22.86 | v86.29,22.86 J7.4 | C107.1 89.12,21.24 L13.2 88.85,22.21 C106.2 86.94,22.21 v86.29,22.86
  other vias: 83.37,40.89 83.62,37.59 83.88,39.5 84.64,40.51 83.11,32.77 83.11,31.24
  pour Top (isolate 0.381, rank 2): 86.49,45.97 87.63,44.83 87.63,29.85 87.12,21.72 90.04,19.18 90.04,16.64 84.84,15.88 82.42,18.29 82.42,45.85
  pour Bottom (isolate 0.381, rank 2): 86.61,45.59 87.76,44.45 87.76,29.46 87.25,21.34 90.17,18.8 90.17,16.26 84.96,15.49 82.55,17.91 82.55,45.47
  pour Route15: 89.92,16.38 83.44,16.38 82.55,17.27 82.55,44.83 83.31,45.59 86.49,45.59 87.5,44.58 87.5,42.93 85.98,41.4 85.98,32.51 87.12,31.37 87.12,21.08 89.92,18.29
GNDIO  (via drill 0.35)  (1 unrouted)
  Top 0.254: v85.58,65.5 85.85,65.23 85.85,64.99 87.77,63.07 87.77,61.33 v87.55,61.11 87.55,60.91 L8.1
  Bottom 0.254: 88.5,60.85 C82.1 88.07,60.71 v87.55,61.11 | C87.2 85.05,66.04 85.19,65.89 | 85.19,65.89 v85.58,65.5 | 85.19,65.89 85.22,65.91 85.24,66.03 85.24,67.21 C88.1 | v90.08,61.11 90.08,61.65 U13.8
  other vias: 90.21,60.47 92.5,62.38 89.7,58.19 90.34,57.8 93.89,63.14 94.53,62.25 95.93,62.12 95.16,61.36 95.93,59.96 95.29,58.95 95.93,57.55 95.29,56.53 94.66,55.52 95.93,55.26 94.4,54.25 91.1,56.41 88.94,57.8 96.82,58.57 96.82,56.28 96.94,60.98
  pour Bottom (isolate 0.381): 88.48,53.85 88.52,64.08 98.3,63.95 97.79,53.63
  pour Top: 97.66,62.74 96.52,63.63 90.68,64.39 87.38,61.34 87.25,56.13 89.79,54.1 96.65,54.1 97.79,56.77
  pour Route2 (isolate 0.381): 92.07,63.63 96.77,63.63 97.79,62.61 97.79,54.48 97.03,53.72 89.92,53.72 88.14,55.5 88.14,59.69
  pour Route15 (isolate 0.381): 92.07,63.5 96.77,63.5 97.79,62.48 97.79,54.61 96.27,53.09 90.55,53.09 88.27,55.37 88.27,59.69
GNDIO1  (via drill 0.35)  (1 unrouted)
  Top 0.254: v85.58,31.21 85.85,30.94 85.85,30.7 87.77,28.78 87.77,27.04 v87.55,26.82 87.55,26.62 L14.1
  Bottom 0.254: 88.5,26.56 C99.1 88.07,26.42 v87.55,26.82 | C104.2 85.05,31.75 85.19,31.6 | 85.19,31.6 v85.58,31.21 | 85.19,31.6 85.22,31.62 85.24,31.74 85.24,32.92 C105.1 | v90.08,26.82 90.08,27.36 U15.8
  other vias: 90.21,26.18 92.5,28.09 89.7,23.9 90.34,23.51 93.89,28.85 94.53,27.96 95.93,27.83 95.16,27.07 95.93,25.67 95.29,24.66 95.93,23.26 95.29,22.24 94.66,21.23 95.93,20.97 94.4,19.96 91.1,22.12 88.94,23.51 96.82,24.28 96.82,21.99 96.94,26.69
  pour Bottom (isolate 0.381): 88.48,19.56 88.52,29.79 98.3,29.66 97.79,19.34
  pour Top: 97.66,28.45 96.52,29.34 90.68,30.1 87.38,27.05 87.25,21.84 89.79,19.81 96.65,19.81 97.79,22.48
  pour Route2 (isolate 0.381): 92.07,29.34 96.77,29.34 97.79,28.32 97.79,20.19 97.03,19.43 89.92,19.43 88.14,21.21 88.14,25.4
  pour Route15 (isolate 0.381): 92.07,29.21 96.77,29.21 97.79,28.19 97.79,20.32 96.27,18.8 90.55,18.8 88.27,21.08 88.27,25.4
I2C_SCL  (via drill 0.35)  (1 unrouted)
  Top 0.254: v87.16,62.71 86.7,62.24 84.84,62.24 | 84.84,62.24 R43.2 | 84.84,62.24 84.7,62.11 85.34,61.47 v85.34,58.76
  Bottom 0.254: U13.13 87.16,62.79 v87.16,62.71 | J11.3 v85.34,58.76
I2C_SCL1  (via drill 0.35)  (1 unrouted)
  Top 0.254: v87.16,28.42 86.7,27.95 84.84,27.95 | 84.84,27.95 R45.2 | 84.84,27.95 84.7,27.82 85.34,27.18 v85.34,24.47
  Bottom 0.254: U15.13 87.16,28.5 v87.16,28.42 | J7.3 v85.34,24.47
I2C_SDA  (via drill 0.35)  (1 unrouted)
  Top 0.254: v86.61,63.37 85.97,63.37 85.71,63.12 84.07,63.12 83.31,62.36 R42.2 84.74,60.82 v84.74,59.76
  Bottom 0.254: U13.14 87.04,63.37 v86.61,63.37 | J11.2 v84.74,59.76
I2C_SDA1  (via drill 0.35)  (1 unrouted)
  Top 0.254: v86.61,29.08 85.97,29.08 85.71,28.83 84.07,28.83 83.31,28.07 R44.2 84.74,26.53 v84.74,25.47
  Bottom 0.254: U15.14 87.04,29.08 v86.61,29.08 | J7.2 v84.74,25.47
LIPO  (via drill 0.35)
  Top 0.152: 55.15,11.98 55.15,9.05 54.26,8.16 54.26,6.51 53.59,5.84 v53.59,5.21
  Bottom 0.152: 50.91,3.81 51.05,4.2 51.05,4.83 51.17,4.94 52.58,4.94 52.85,5.21 v53.59,5.21
MISO  (via drill 0.35)
  Top 0.152: 32.26,14.06 33.09,14.06 v33.27,13.87 | 28.61,2.97 28.65,3.02 28.65,7.19 28.96,7.49 30.1,7.49 30.65,8.04 v31.1,8.04
  Bottom 0.152: v33.27,13.87 31.39,11.99 31.39,9.12 31.1,8.82 v31.1,8.04
MISO1  (via drill 0.35)
  Top 0.152: 32.77,36.85 33.51,36.12 35.18,36.12 36.3,35 36.3,28.52 v36.55,28.27 | 32.38,15.36 32.26,15.36 32.16,15.36 32.07,15.44 v31.75,15.44
  Bottom 0.152: v36.55,28.27 36.24,27.97 36.24,25.65 30.94,20.35 30.94,16.25 v31.75,15.44
MISO2  (via drill 0.35)
  Top 0.152: 32.77,62.25 33.33,61.7 34.98,61.7 37.25,59.43 37.25,58.56 38.84,56.97 38.84,25.35 38.32,24.83 38.32,23.14 39.65,21.81 39.65,16.06 v39.45,15.86 | v34.49,15.29 34.49,14.02 33.22,12.75 32.27,12.75 32.26,12.76
  Bottom 0.152: v34.49,15.29 38.18,15.29 38.5,15.61 39.37,15.61 39.37,15.78 v39.45,15.86
MISO3  (via drill 0.35)
  Top 0.152: 47.24,63.98 46.05,63.98 45.54,64.49 40.28,64.49 39.38,63.59 39.38,59.45 40.97,57.86 40.97,26.84 41.11,26.7 41.11,22.52 41.22,22.4 41.22,20.9 v41.86,20.26 | v33.27,14.73 32.29,14.73 32.26,14.71
  Bottom 0.152: v33.27,14.73 38.05,14.73 38.62,15.3 39.94,15.3 40.01,15.37 40.01,16.33 40.13,16.46 40.13,19.56 40.84,20.26 v41.86,20.26
MISO4  (via drill 0.35)
  Top 0.152: v31.5,13.41 32.26,13.41 | 47.24,38.33 45.59,38.33 45.57,38.31 43.72,38.31 42.62,37.21 42.62,27.56 43.24,26.94 43.24,23.84 43.77,23.32 v43.77,22.4
  Bottom 0.152: v43.77,22.4 43.69,22.33 37.72,22.33 37.66,22.38 36.45,22.38 34.14,20.07 34.1,20.07 34.1,17.59 32.41,15.9 32.41,14.32 v31.5,13.41
MOSI  (via drill 0.35)
  Top 0.152: 38.1,13.41 v37.09,13.41 v37.08,13.41 | v31.95,9.65 31.09,8.79 30.97,8.79 29.98,7.8 28.63,7.8 28.11,7.28 28.11,5.36
  Bottom 0.152: v37.08,13.41 35.71,13.41 34.9,12.6 34.9,11.28 33.27,9.65 v31.95,9.65
MOSI1
  Top 0.152: 31.97,36.85 31.97,36.23 32.38,35.81 35.05,35.81 35.79,35.08 35.79,27.89 36.06,27.61 36.06,27.15 35.99,27.08 35.99,21.82 35.81,21.64 35.81,18.22 36.38,17.65 36.38,15.77 36.27,15.67 36.02,15.42 35.72,15.11 35.72,12.67 36.13,12.25 36.84,12.25 37.34,12.76 38.1,12.76
MOSI2
  Top 0.152: 31.97,62.25 31.97,61.75 32.33,61.39 34.86,61.39 36.94,59.3 36.94,58.44 38.53,56.85 38.53,25.48 38.01,24.96 38.01,23.02 39.35,21.68 39.35,16.54 38.89,16.09 38.89,15.63 39.5,15.02 39.5,14.61 38.95,14.06 38.1,14.06
MOSI3  (via drill 0.35)
  Top 0.152: 48.04,63.98 48.04,64.48 47.68,64.85 40.21,64.85 39.32,63.96 39.08,63.71 39.08,59.32 40.66,57.73 40.66,26.71 40.8,26.58 40.8,22.39 40.92,22.27 40.92,20.04 v41.55,19.41 | v38.85,14.74 38.81,14.71 38.1,14.71
  Bottom 0.152: v41.55,19.41 41.48,19.41 40.44,18.37 40.44,16.33 40.37,16.27 40.37,15.1 40.02,14.74 v38.85,14.74
MOSI4  (via drill 0.35)
  Top 0.152: 48.04,38.33 48.04,38.96 47.55,39.45 44.43,39.45 42.32,37.34 42.32,27.3 42.94,26.68 42.94,21.39 42.94,20.17 42.94,19.86 42.97,19.83 42.97,19.07 41.3,17.4 v41.3,15.11 | v38.86,12.07 38.14,12.07 38.1,12.11
  Bottom 0.152: v38.86,12.07 38.86,12.6 41.3,15.04 v41.3,15.11
MOT0_1  (via drill 0.35)
  Top 0.381: v67.69,8.25 67.67,8.23 67.67,5.59
  Bottom 0.381: v67.69,8.25 68.94,9.5 68.94,9.62 68.93,9.63 68.93,10.18 68.94,10.19 68.94,11.48
MOT0_2  (via drill 0.35)